# Altium PCB Antenna_sw.PcbDoc
Units mil, origin at the board's own origin, x right, y up, seen from the top; angles counter-clockwise.
Board outline 1574.8 x 1574.8 mil, 4 copper layers (Component Side, Ground Plane, Power Plane, Solder Side), stack 59.729 mil thick; 19 components, 15 nets, 89 pads, 209 vias.
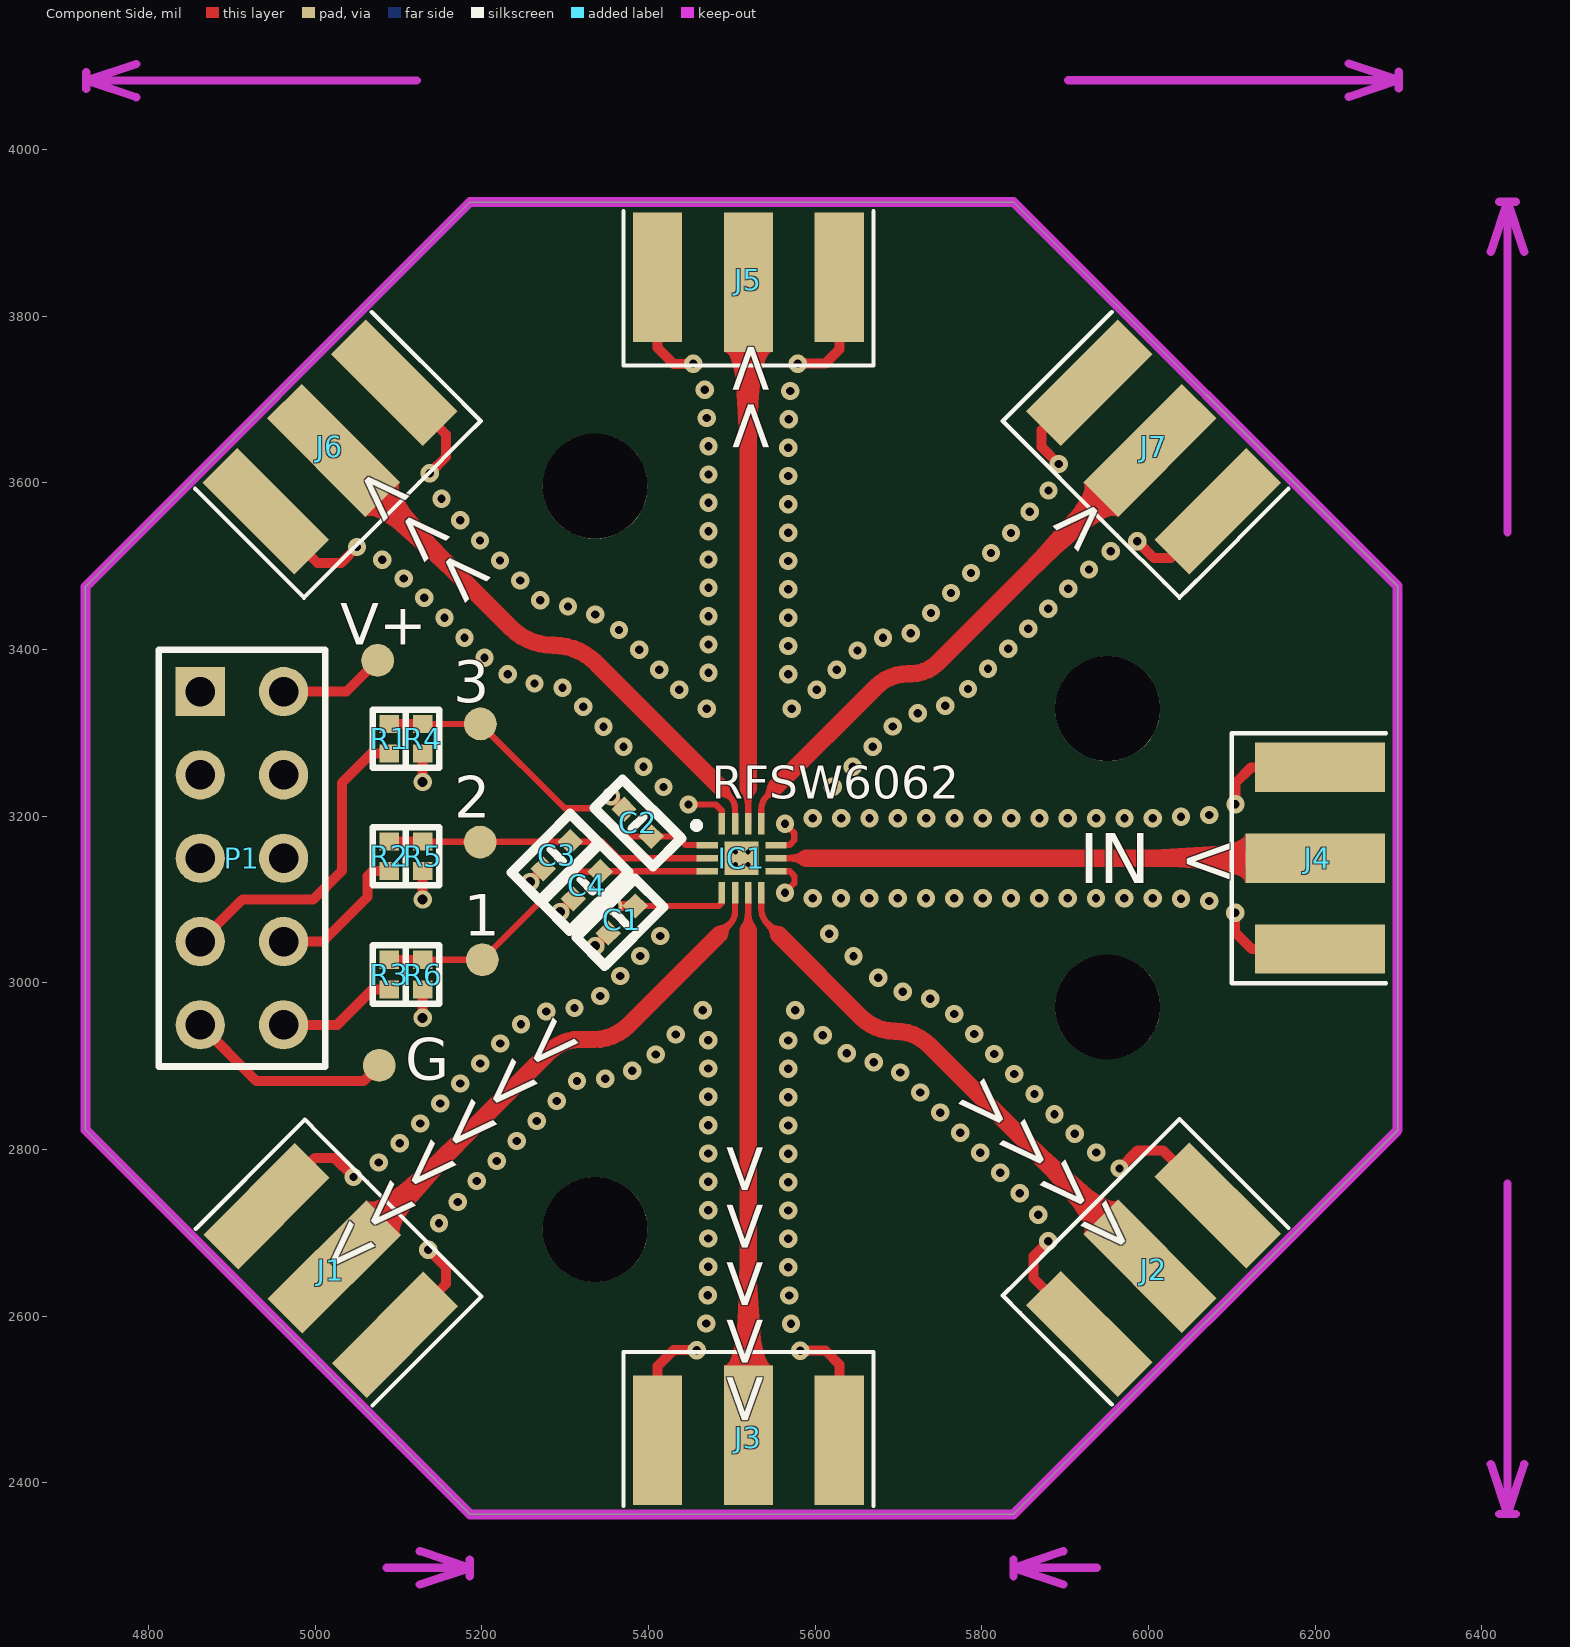
[diagram p0: Component Side view]
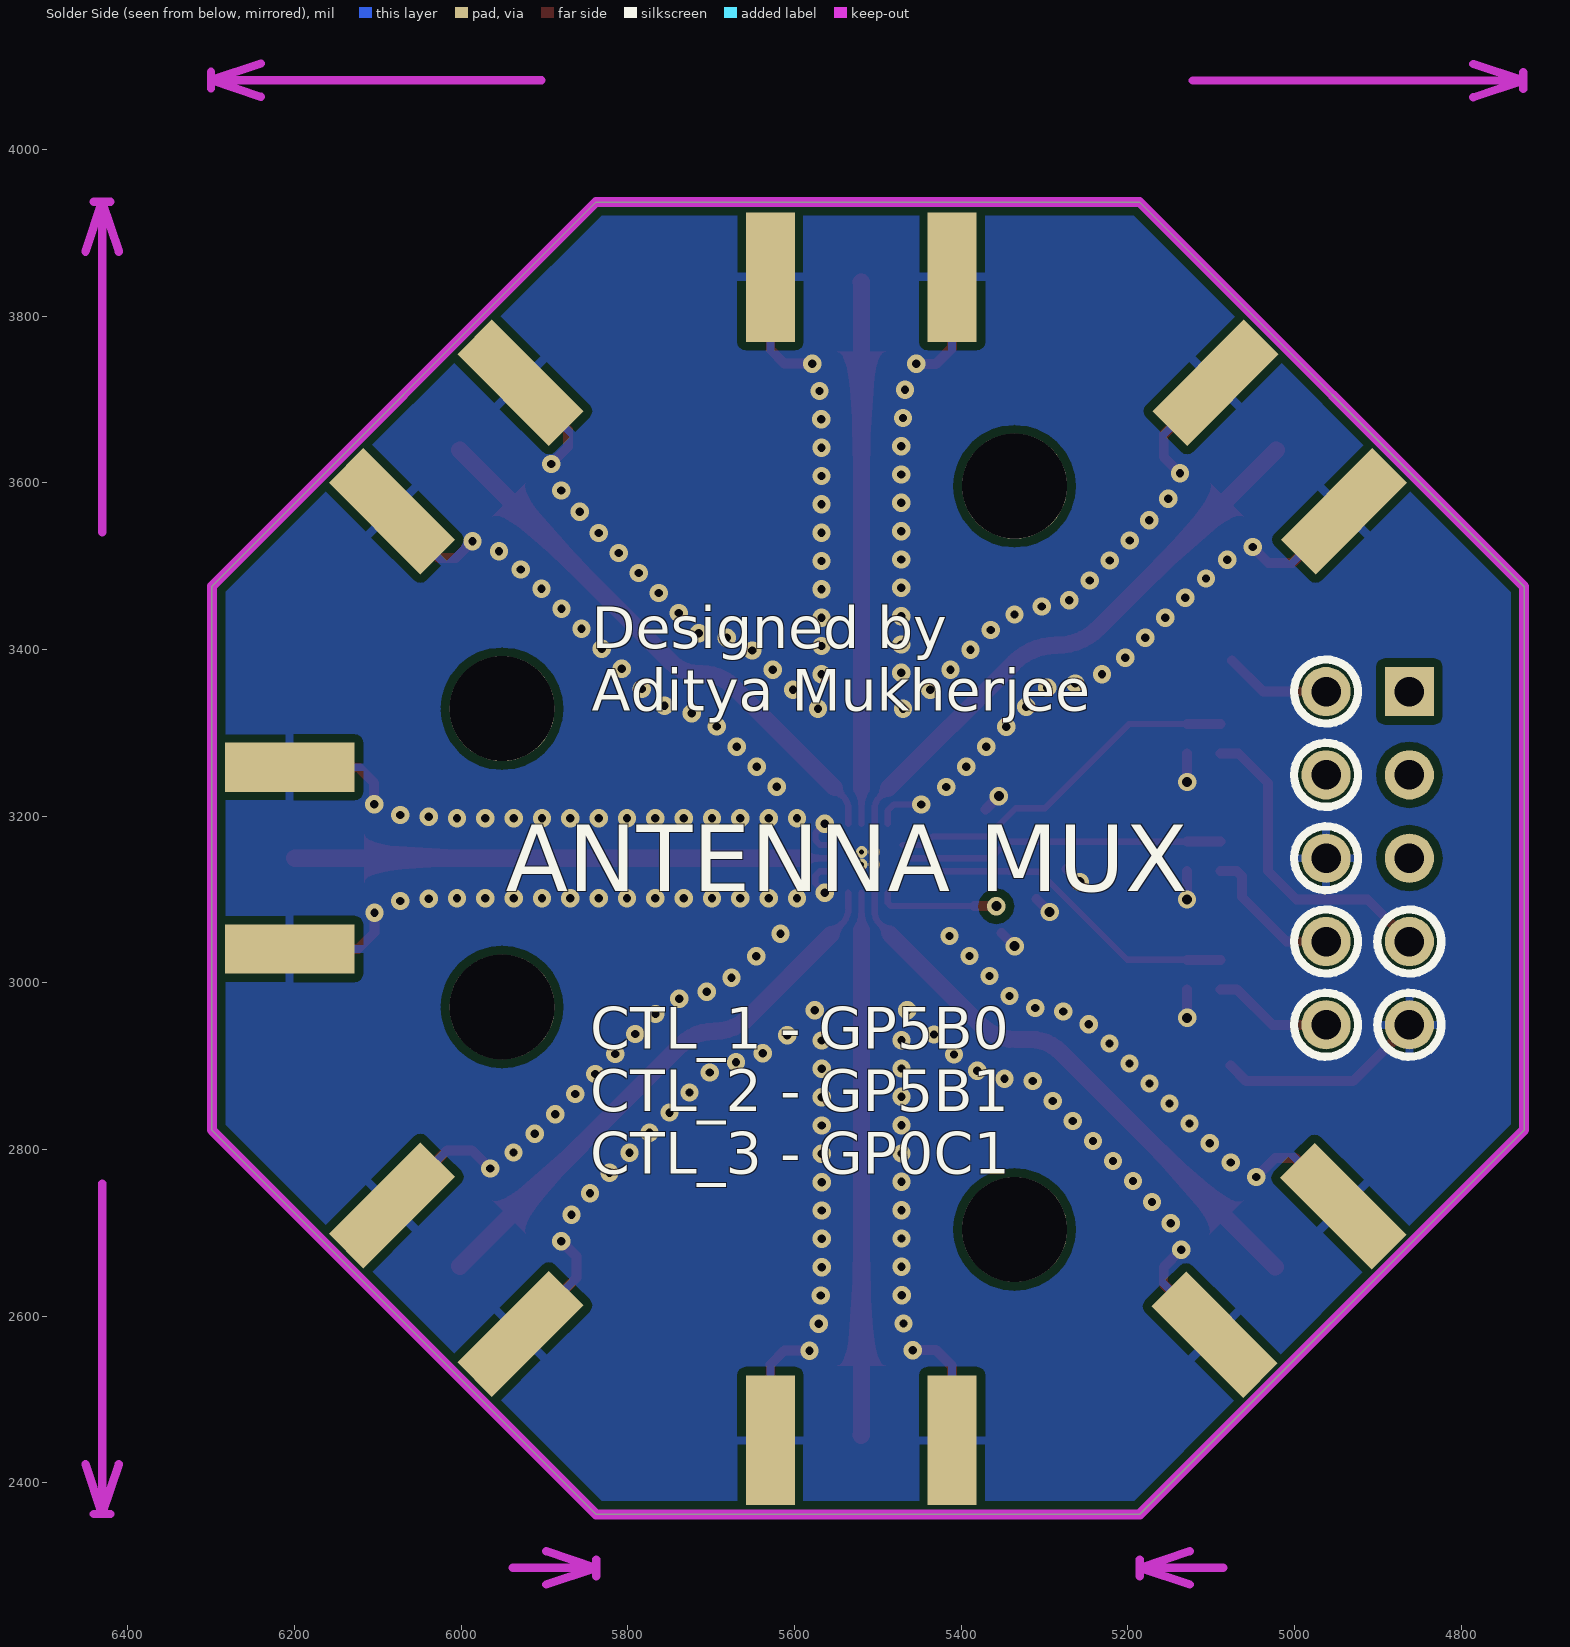
[diagram p1: Solder Side view, seen from below]
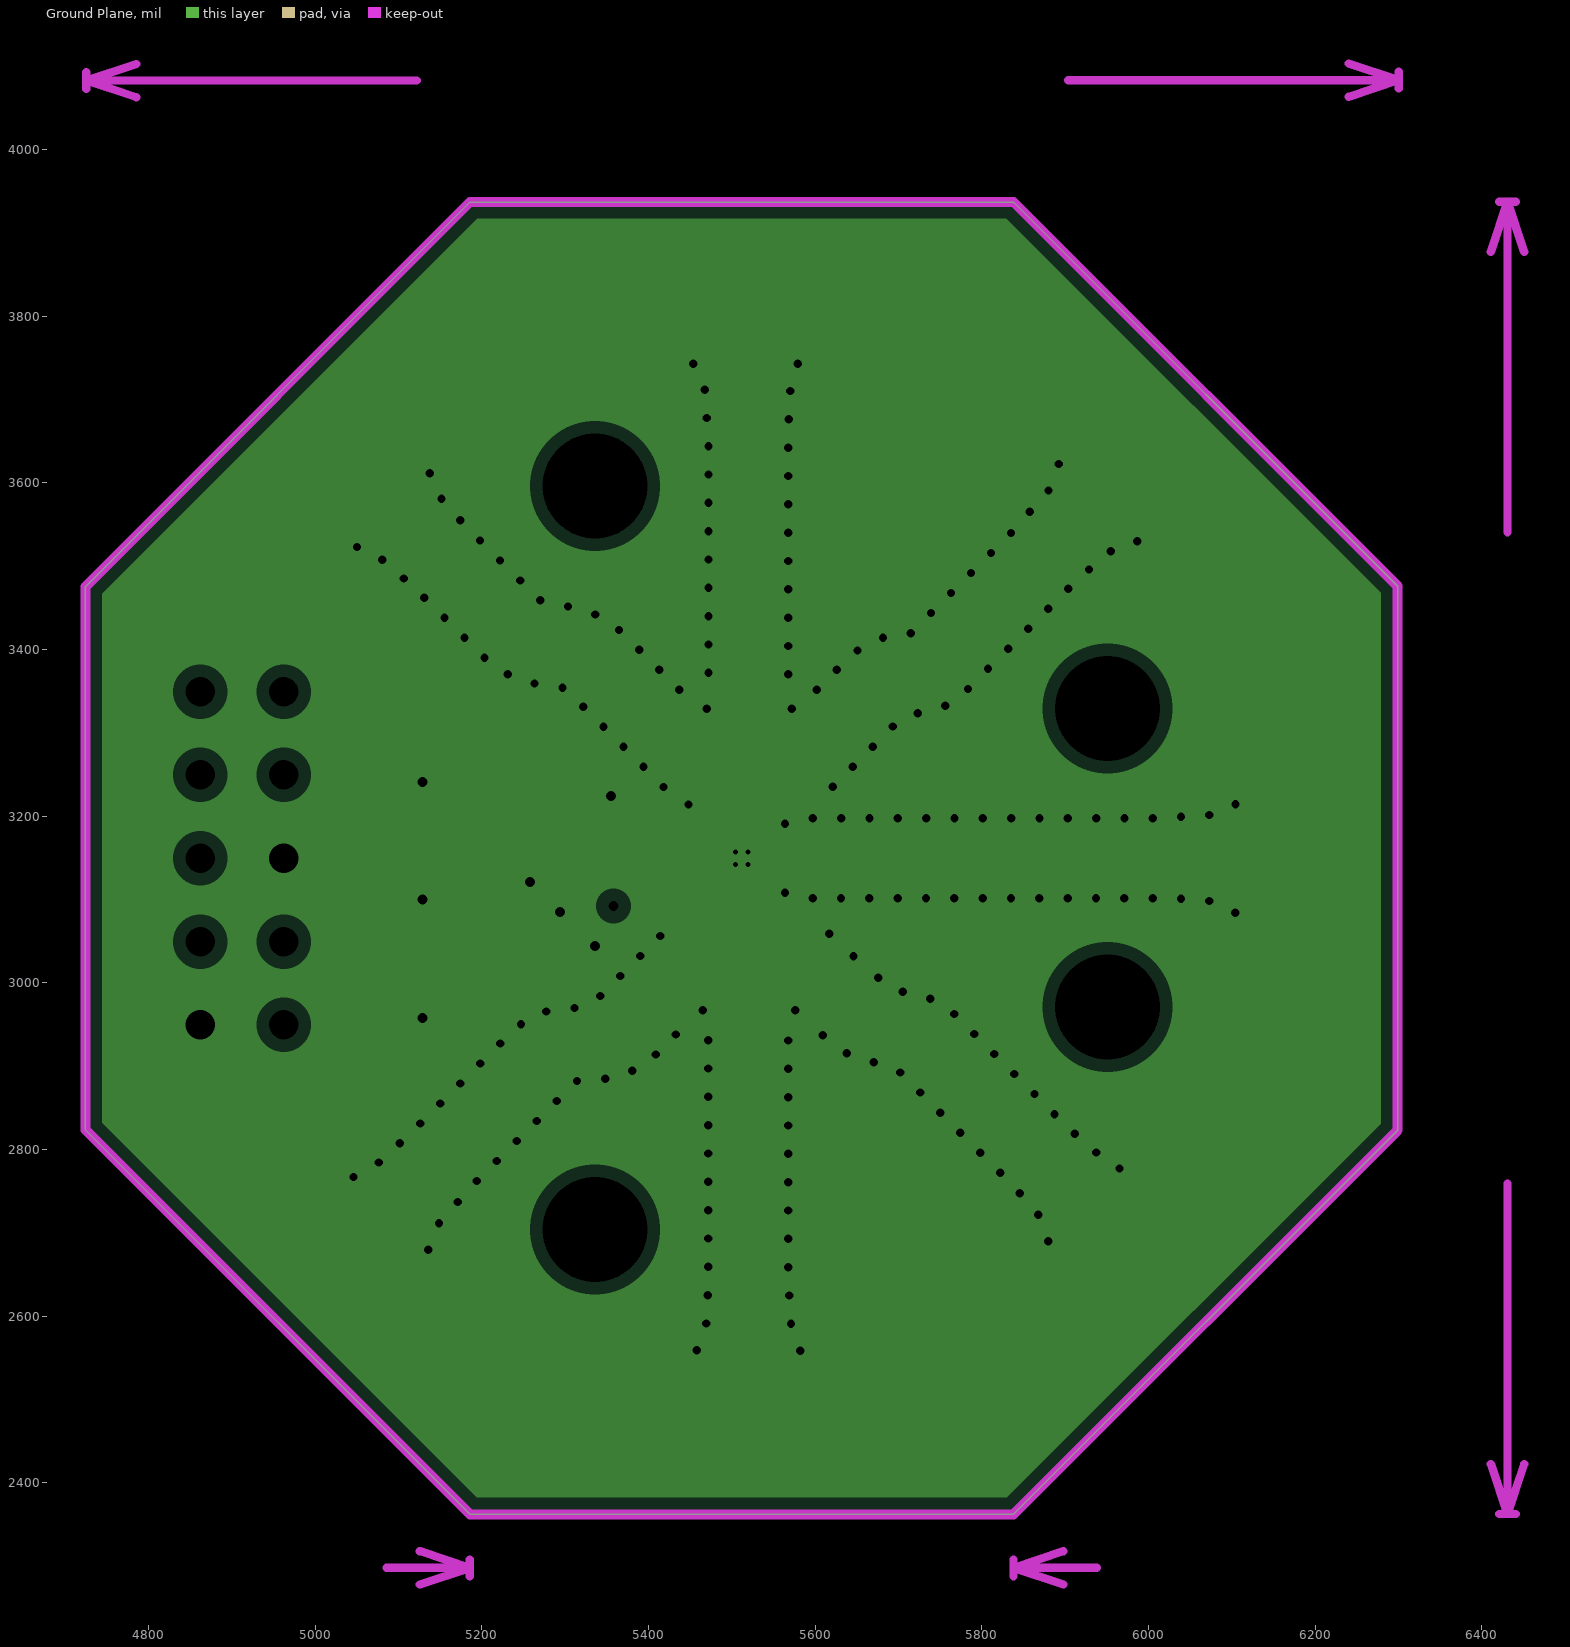
[diagram p2: Ground Plane, clearances drawn from the general rule]
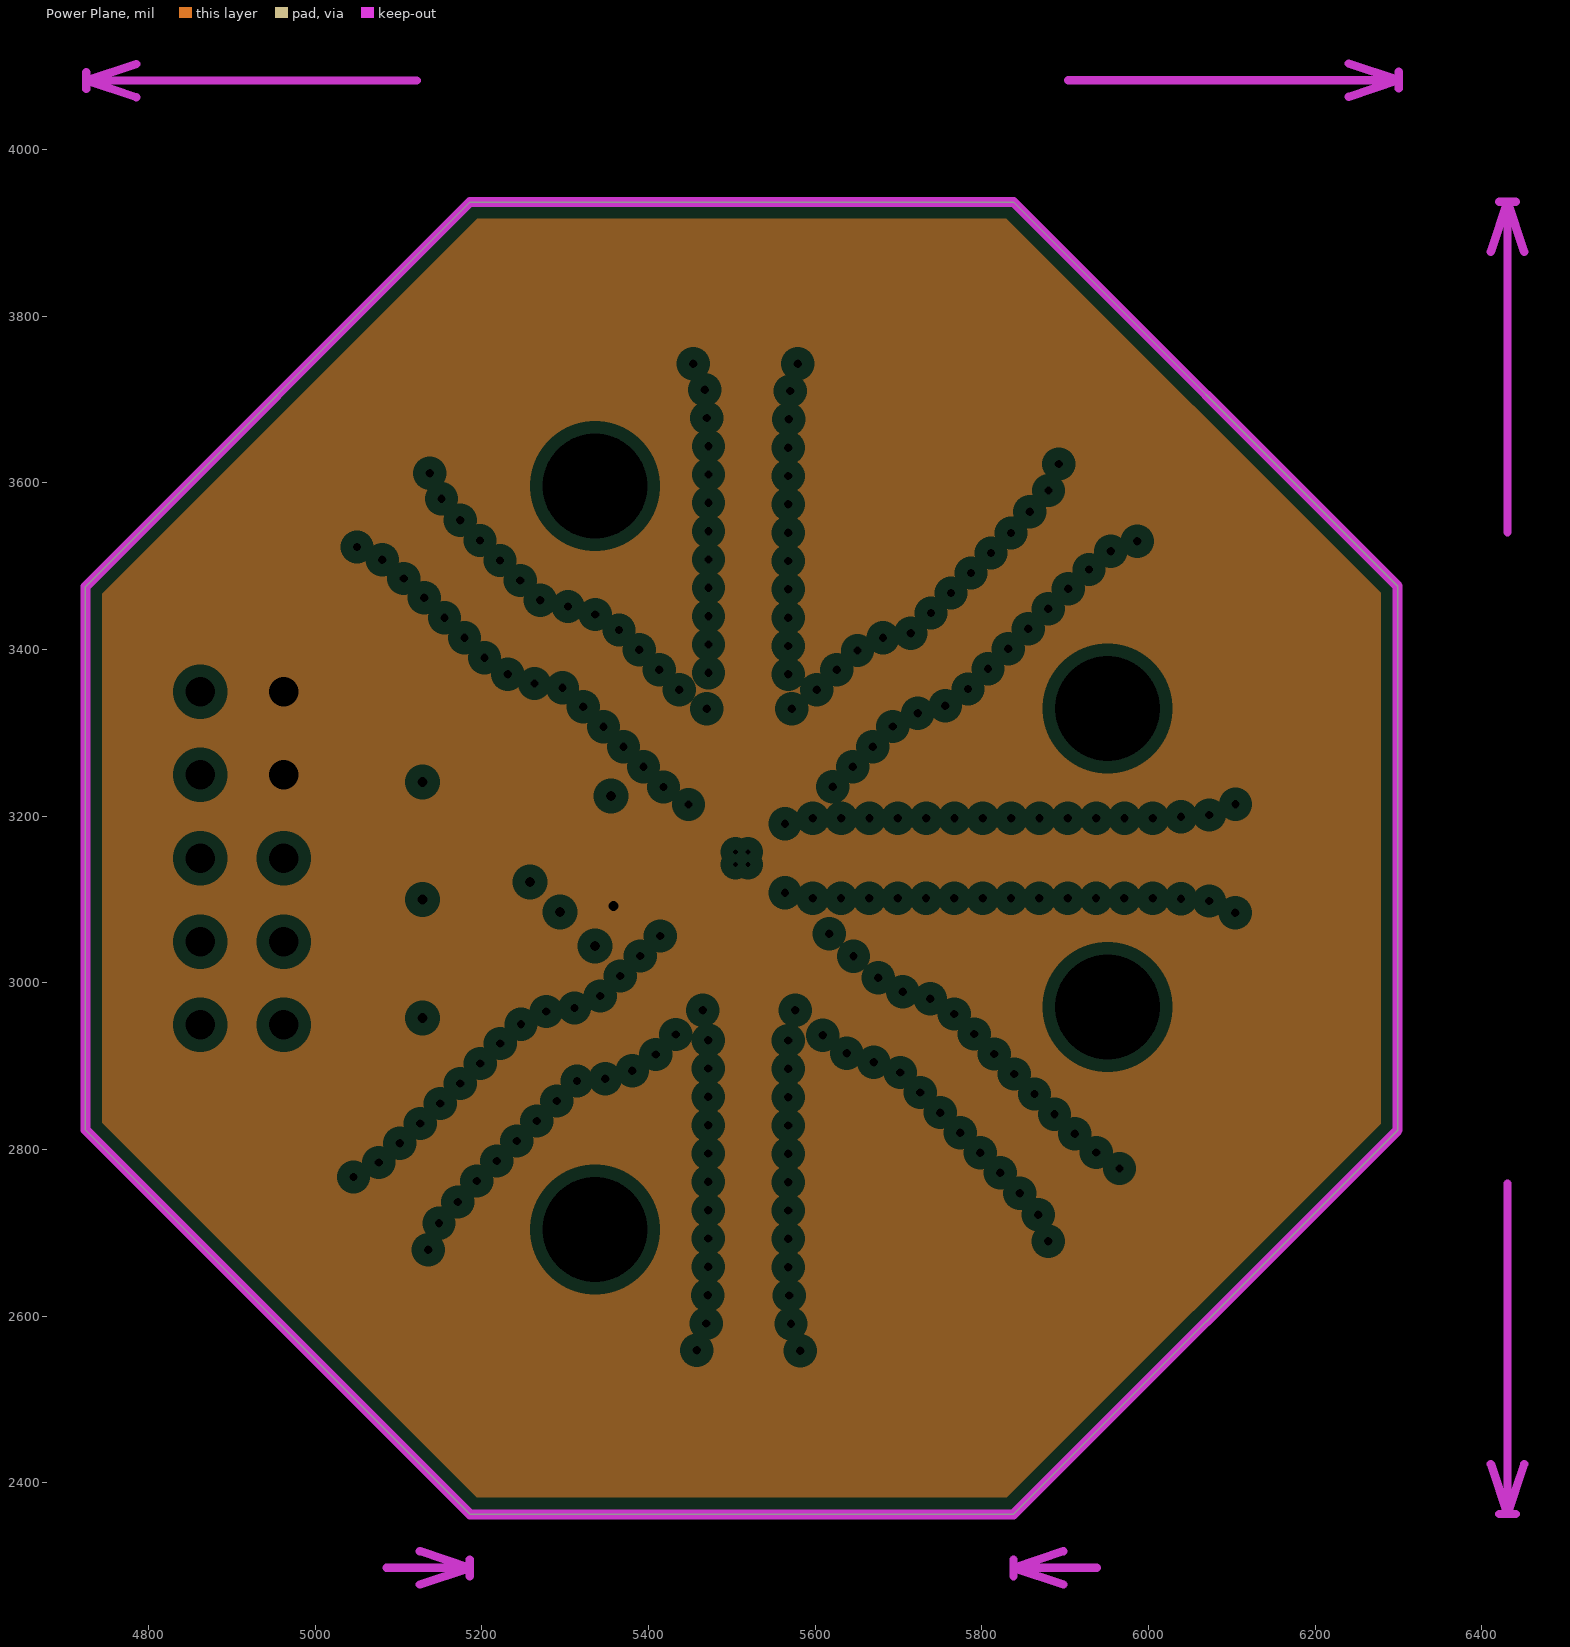
[diagram p3: Power Plane, clearances drawn from the general rule]

## Layer stack, top to bottom
Top Solder: solder mask 0.4, Solder Resist, Dk 3.5
Component Side: signal copper 1.4
Dielectric 1: prepreg 13.7795, FR-4, Dk 4.2
Ground Plane: plane copper 0.7087, net GND
Dielectric 3: core 27.9528, Dk 4.2
Power Plane: plane copper 0.7087, net VCC
Dielectric 4: prepreg 13.7795, Dk 4.2
Solder Side: signal copper 1.4
Bottom Solder: solder mask 0.4, Solder Resist, Dk 3.5

## Board outline
4724.41,2823.59 5185.8,2362.2 5838.2,2362.2 6299.21,2823.21 6299.21,3475.98 5838.18,3937.01 5186.01,3937.01 4724.41,3475.41

## Design rules (kind name [scope] priority, off if disabled: settings)
Clearance Clearance_4 [InNamedPolygon('gnd_bottom')] p1: gap=10 ignorepadtopadclearanceinfootprint=FALSE except(0: Arc-Hole Track-Hole SMDPad-Hole THPad-Hole Via-Hole Fill-Hole Poly-Hole Region-Hole Text-Hole)
Clearance Clearance_3 [InNamedPolygon('gnd_bottom')] p2: gap=7 ignorepadtopadclearanceinfootprint=FALSE
Clearance Clearance_2 [InNamedPolygon('gnd_bottom')] p3: gap=10 ignorepadtopadclearanceinfootprint=FALSE except(0: Arc-Hole Track-Hole SMDPad-Hole THPad-Hole Via-Hole Fill-Hole Poly-Hole Region-Hole Text-Hole)
Clearance Clearance_1 [InNamedPolygon('gnd_bottom')] p4: gap=15 ignorepadtopadclearanceinfootprint=FALSE
Clearance [All] p5: gap=5 ignorepadtopadclearanceinfootprint=FALSE
ComponentClearance [All] p1: gap=0 collisioncheckmode=3 verticalgap=0 showdistances=FALSE
PlaneClearance [All] p1: clearance=15
PlaneConnect [All] p1: planeconnectstyle=Direct reliefexpansion=20 reliefentries=4 reliefconductorwidth=10 reliefairgap=10
PolygonConnect PolygonConnect_5 [All vs IsNamedPolygon('gnd_bottom')] p1: thpad.connectstyle=Relief thpad.reliefconductorwidth=10 thpad.reliefentries=4 thpad.polygonreliefangle="90 Angle" thpad.airgapwidth=10 smdpad.connectstyle=Relief smdpad.reliefconductorwidth=10 smdpad.reliefentries=4 smdpad.polygonreliefangle="90 Angle" smdpad.airgapwidth=10 via.connectstyle=Direct via.reliefconductorwidth=10 via.reliefentries=4 via.polygonreliefangle="90 Angle" via.airgapwidth=10
PolygonConnect PolygonConnect_4 [All vs IsNamedPolygon('gnd_bottom')] p2: thpad.connectstyle=Relief thpad.reliefconductorwidth=10 thpad.reliefentries=4 thpad.polygonreliefangle="90 Angle" thpad.airgapwidth=10 smdpad.connectstyle=Relief smdpad.reliefconductorwidth=10 smdpad.reliefentries=4 smdpad.polygonreliefangle="90 Angle" smdpad.airgapwidth=10 via.connectstyle=Direct via.reliefconductorwidth=10 via.reliefentries=4 via.polygonreliefangle="90 Angle" via.airgapwidth=10
PolygonConnect PolygonConnect_3 [All vs IsNamedPolygon('gnd_bottom')] p3: connectstyle=Relief reliefconductorwidth=10 reliefentries=4 polygonreliefangle="90 Angle" airgapwidth=10
PolygonConnect PolygonConnect_2 [All vs IsNamedPolygon('gnd_bottom')] p4: thpad.connectstyle=Relief thpad.reliefconductorwidth=10 thpad.reliefentries=4 thpad.polygonreliefangle="90 Angle" thpad.airgapwidth=10 smdpad.connectstyle=Relief smdpad.reliefconductorwidth=10 smdpad.reliefentries=4 smdpad.polygonreliefangle="90 Angle" smdpad.airgapwidth=10 via.connectstyle=Direct via.reliefconductorwidth=10 via.reliefentries=4 via.polygonreliefangle="90 Angle" via.airgapwidth=10
PolygonConnect PolygonConnect_1 [All vs IsNamedPolygon('gnd_bottom')] p5: thpad.connectstyle=Relief thpad.reliefconductorwidth=10 thpad.reliefentries=4 thpad.polygonreliefangle="90 Angle" thpad.airgapwidth=10 smdpad.connectstyle=Direct smdpad.reliefconductorwidth=10 smdpad.reliefentries=4 smdpad.polygonreliefangle="90 Angle" smdpad.airgapwidth=10 via.connectstyle=Direct via.reliefconductorwidth=10 via.reliefentries=4 via.polygonreliefangle="90 Angle" via.airgapwidth=10
PolygonConnect [All] p6: connectstyle=Relief reliefconductorwidth=10 reliefentries=4 polygonreliefangle="90 Angle" airgapwidth=10
RoutingVias [All] p1: holewidth=10 width=25 viastyle="Through Hole" minholewidth=6 minwidth=10 maxholewidth=28 maxwidth=50
SolderMaskExpansion [All] p1: expansion=4
UnRoutedNet [All] p1: checkbadconnections=TRUE
Width [All] p1: maxlimit=30 minlimit=7 preferedwidth=12
26 further rules are at their usual default settings.

## Components (designator, comment, footprint, x,y, rotation, side; value= is the part's Value field where it differs from the comment)
C1 "10nF" SMD-0402C 5368,3076 r315 top
C2 "100pF" SMD-0402C 5387,3192 r225 top
C3 "100pF" SMD-0402C 5290,3153 r315 top
C4 "100pF" SMD-0402C 5326,3117 r315 top
IC1 "RFSW6062TR7" QFN40P200X200X60-15N-D 5511.81,3149.61 r0 top
J1 "Component_1" PCBComponent_1#1 5023,2659 r45 top
J2 "SMA" PCBComponent_1#1 6002,2660 r135 top
J3 "Component_1" PCBComponent_1#1 5520,2457 r90 top
J4 "RF_in" PCBComponent_1#1 6200,3149.61 r180 top
J5 "Component_1" PCBComponent_1#1 5520,3841 r270 top
J6 "Component_1" PCBComponent_1#1 5022,3639 r315 top
J7 "Component_1" PCBComponent_1#1 6002,3639 r225 top
P1 "Header 5X2" HDR2X5 4862.2,3349.61 r270 top
R1 "10K" PCBComponent_1#2 5089,3293 r270 top
R2 "10K" PCBComponent_1#2 5089,3152 r270 top
R3 "10K" PCBComponent_1#2 5089,3010 r270 top
R4 "33K" PCBComponent_1#2 5129,3293 r90 top
R5 "33K" PCBComponent_1#2 5129,3152 r90 top
R6 "33K" PCBComponent_1#2 5129,3010 r90 top

## Footprints (in the part's own frame and the unit in brackets; to place one, negate y for a bottom-side part, rotate by r counter-clockwise, add the part's x,y. Pads: shape width x height; smd on the part's side, far side on the other; paste and mask are expansions set on the pad)
HDR2X5 [mm] "Connector; Header; 5x2 Position"
  rect 1.5x1.5 hole 0.9: 1(0,0)
  round 1.5 hole 0.9: 2(0,2.54) 3(2.54,0) 4(2.54,2.54) 5(5.08,0) 6(5.08,2.54) 7(7.62,0) 8(7.62,2.54) 9(10.16,0) 10(10.16,2.54)
  silkscreen extent -1.27,-1.27 11.43,3.81
PCBComponent_1#1 [mm]
  rect 4.25x1.5 smd mask+0.05: 1(0,0)
  rect 3.95x1.5 smd mask+0.05: 2(-0.15,-2.77) 2(-0.15,2.77)
  rect 3.95x1.5 smd far side mask+0.05: 2(-0.15,-2.77) 2(-0.15,2.77)
  silkscreen extent -2.16,-3.81 2.54,3.81
PCBComponent_1#2 [mm]
  rect 0.55x0.6 smd: 1(-0.45,0) 2(0.45,0)
  silkscreen extent -0.89,-0.51 0.89,0.51, body extent -0.55,-0.25 0.55,0.25, height 0.35
QFN40P200X200X60-15N-D [mm]
  rect 0.65x0.2 smd: 1(-1.05,0.4) 2(-1.05,0) 3(-1.05,-0.4) 8(1.05,-0.4) 9(1.05,0) 10(1.05,0.4)
  rect 0.2x0.65 smd: 4(-0.6,-1.05) 5(-0.2,-1.05) 6(0.2,-1.05) 7(0.6,-1.05) 11(0.6,1.05) 12(0.2,1.05) 13(-0.2,1.05) 14(-0.6,1.05)
  rect 1.03x1.03 smd: 15(0,0)
  silkscreen extent -1.47,0.9 -1.28,1.1, body extent -1.05,-1.05 1.05,1.05, height 0.6
SMD-0402C [mm]
  rect 0.55x0.55 smd: 1(0,0.584) 2(0,-0.584)
  silkscreen extent -0.25,0 0.25,0, body extent -0.25,-0.51 0.25,0.51, height 0.51

## Part data
C1 C2 C3 C4: library part GCM155C71A105KE38D, "CAP CER 1UF 10V X7S 0402", Digi-Key Part Number=490-13409-1-ND, Manufacturer="Murata Electronics North America", Operating Temperature="-55°C ~ 125°C", Package / Case="0402 (1005 Metric)", Ratings=AEC-Q200, Temperature Coefficient=X7S, Tolerance=±10%, Voltage=10V, @ qty=0, Applications=Automotive, Datasheets=http://www.murata.com/~/media/webrenewal/support/library/catalog/products/capacitor/mlcc/c03e.ashx, Factory Stock=0, Features=-, Height - Seated (Max)=-, Image=//media.digikey.com/Renders/Murata%20Renders/ZRB-SERIES-0402.jpg, Lead Spacing=-, Lead Style=-, Minimum Quantity=1, Mounting Type="Surface Mount, MLCC", Packaging="Cut Tape (CT)", Part Number=GCM155C71A105KE38D, Part Status=Active, Quantity Available=7240, Series=GCM, Size / Dimension="0.039\" L x 0.020\" W (1.00mm x 0.50mm)", Thickness (Max)="0.022\" (0.55mm)", Unit Price (USD)=0.12
IC1: "Integrated Circuit", Manufacturer_Name=RFMD, Mouser Part Number=772-RFSW6062, Datasheet Link=https://componentsearchengine.com/Datasheets/1/RFSW6062TR7.pdf, Height=0.6mm, Manufacturer_Part_Number=RFSW6062TR7
J2 J4 R1 R2 R3 R4 R5 R6: library part Component_1
P1: "Header, 5-Pin, Dual row", LatestRevisionDate=17-Jul-2002, LatestRevisionNote="Re-released for DXP Platform.", Publisher="Altium Limited"

## Free pads (board coordinates)
  round 39.37 smd: 2(5075,3387) 3(5077,2901) 4(5198.29,3310.71) 5(5198,3169) 6(5200.72,3027.72)
  round 125.98 hole 125.98 unplated: Hole_1(5951,3329) Hole_2(5951,2971) Hole_3(5336,2704) Hole_4(5336,3596)

## Via types
v1: diameter 22, hole 10, Component Side to Solder Side, tented both sides, 197 vias
v2: diameter 22, hole 12, Component Side to Solder Side, tented both sides, 8 vias
v3: diameter 14, hole 6, Component Side to Solder Side, tented bottom, 4 vias

## Nets (pads, with @x,y where several pads share a name; then routed paths per layer and width w, separated by ;. In a path a pad name is that pad's centre, name@x,y a point inside that pad or via, vN(x,y) a via of type N, cw(c..) or ccw(c..) an arc to the next point about the centre after c; other vN are vias at no path point)
CTL_1: C4.1 IC1.3 pad.6 R3.1 R6.2 | length 425.4
  Component Side w7.6: R6.2 pad.6 5306.26,3133.26 C4.1 5342.86,3133.86 IC1.3
  Component Side w12: R3.1 R6.2
CTL_1H: P1.10 R3.2 | length 144.5
  Component Side w12: P1.10 5026.61,2949.61 5069.28,2992.28 R3.2
CTL_2: C3.1 IC1.2 pad.5 R2.1 R5.2 | length 389.8
  Component Side w7.6: R5.2 5129.44,3169.26 C3.1 5344.74,3169.26 5364.39,3149.61 IC1.2
  Component Side w12: R2.1 R5.2
CTL_2H: P1.8 R2.2 | length 176.5
  Component Side w12: P1.8 5009.61,3049.61 5063,3103 5063,3128 5069.28,3134.28 R2.2
CTL_3: C2.1 IC1.1 pad.4 R1.1 R4.2 | length 441.7
  Component Side w7.6: R4.2 pad.4 5299.52,3209.48 5334.52,3209.48 5368.26,3175.74 C2.1 5434.26,3175.74 5444.65,3165.35 IC1.1
  Component Side w12: R1.1 R4.2
CTL_3H: P1.7 R1.2 | length 382.2
  Component Side w12: P1.7 4912.6,3100 4997.72,3100 5032,3134.28 5032,3240 5067.28,3275.28 R1.2
GND: C1.2 C2.2 C3.2 C4.2 IC1.8 IC1.10 IC1.14 IC1.15 J1.2 J2.2 J3.2 J4.2 J5.2 J6.2 J7.2 P1.6 P1.9 pad.3 R4.1 R5.1 R6.1 | length 2554.7
  Component Side w7.6: v1(5448,3214) 5481,3214 5488.19,3206.81 IC1.14 ; IC1.8 5569.54,3133.86 5575.2,3128.2 5575.2,3119.6 v1(5563.8,3108.2) ; IC1.10 5569.25,3165.35 5575,3171.1 5575,3179.88 v1(5563.84,3191.04)
  Component Side w12: P1.9 4929.81,2882 5058,2882 pad.3 ; J6.2@4940.71,3566.06 5002.77,3504 5031.33,3504 v1(5050.35,3523.03) ; J1.2@4941.71,2731.94 4999.77,2790 5023,2790 v1(5046,2767) ; J6.2@5094.94,3720.29 5157,3658.23 5157,3631.14 v1(5137.54,3611.69) ; J1.2@5095.94,2577.71 5157,2638.77 5157,2658.77 v1(5135.88,2679.89) ; v2(5129,2958) R6.1 ; v2(5129,3100) R5.1 ; v2(5129,3241) R4.1 ; v2(5258,3121) C3.2 ; v2(5294,3085) C4.2 ; v2(5336,3044) C1.2 ; v2(5355,3224) C2.2 ; J3.2@5410.94,2451.09 5410.94,2539.94 5430.14,2559.14 v1(5458.08,2559.14) ; J5.2@5410.94,3846.91 5410.94,3762.06 5430.03,3742.97 v1(5453.85,3742.97) ; v1(5579,3743) 5612,3743 5629.06,3760.06 J5.2@5629.06,3846.91 ; v1(5582.11,2558.68) 5612.32,2558.68 5629.06,2541.94 J3.2@5629.06,2451.09 ; v1(5880,2690) 5862,2672 5862,2645.77 J2.2@5929.06,2578.71 ; v1(5892.21,3622.73) 5872,3642.94 5872,3663.23 J7.2@5929.06,3720.29 ; v1(5965.26,2777.15) 5987.11,2799 6017.23,2799 J2.2@6083.29,2732.94 ; v1(5986.59,3529.88) 6006.47,3510 6027.23,3510 J7.2@6083.29,3566.06 ; v1(6104.12,3084.32) 6104.12,3060.48 6124.05,3040.55 J4.2@6205.91,3040.55 ; v1(6104.54,3214.3) 6104.54,3239.84 6123.36,3258.66 J4.2@6205.91,3258.66
  other v1: 5469.27,2591.24 5571.05,2590.83 5471.29,2625.18 5568.8,2624.75 5471.76,2659.18 5567.61,2658.73 5471.76,2693.18 5567.61,2692.73 5148.67,2711.39 5867.73,2721.71 5471.76,2727.18 5567.61,2726.73 5171.1,2736.95 5845.6,2747.52 5471.76,2761.18 5567.61,2760.73 5193.92,2762.15 5822.16,2772.15 5076.52,2784.51 5217.96,2786.19 5471.76,2795.18 5567.61,2794.73 5798.16,2796.24 5937.29,2796.48 5101.73,2807.33 5242,2810.23 5911.74,2818.91 5774.12,2820.28 5471.76,2829.18 5567.61,2828.73 5126.02,2831.12 5266.05,2834.27 5887.26,2842.51 5750.08,2844.32 5150.06,2855.16 5290.09,2858.31 5471.76,2863.18 5567.61,2862.73 5863.22,2866.55 5726.04,2868.36 5174.1,2879.2 5314.2,2882.28 5348.09,2885.11 5839.18,2890.59 5702,2892.4 5380.71,2894.69 5471.76,2897.18 5567.61,2896.73 5198.14,2903.24 5670.34,2904.8 5408.67,2914.03 5815.14,2914.63 5638.09,2915.56 5222.18,2927.29 5471.76,2931.18 5567.61,2930.73 5609,2937 5432.78,2938.01 5791.1,2938.68 5247.04,2950.48 5766.9,2962.56 5277.53,2965.53 5465,2967 5576,2967 5311.26,2969.81 5738.33,2981 5342.07,2984.18 5705.36,2989.31 5675.75,3006.02 5366.11,3008.22 5390.16,3032.26 5646,3032 5414.2,3056.3 5617,3059 6073.07,3098.17 6039.17,3100.79 5597.18,3101.73 5631.18,3101.73 5665.18,3101.73 5699.18,3101.73 5733.18,3101.73 5767.18,3101.73 5801.18,3101.73 5835.18,3101.73 5869.18,3101.73 5903.18,3101.73 5937.18,3101.73 5971.18,3101.73 6005.18,3101.66 5597.21,3197.53 5631.21,3197.53 5665.21,3197.53 5699.21,3197.53 5733.21,3197.53 5767.21,3197.53 5801.21,3197.53 5835.21,3197.53 5869.21,3197.53 5903.21,3197.53 5937.21,3197.53 5971.21,3197.53 6005.21,3197.53 6039.17,3199.15 6073.1,3201.36 5418.11,3235.12 5621.23,3235.46 5394.06,3259.16 5645.27,3259.5 5370.02,3283.2 5669.31,3283.54 5345.98,3307.25 5693.36,3307.58 5723.37,3323.55 5470,3329 5572,3329 5321.94,3331.29 5756.15,3332.57 5437.05,3351.73 5602.01,3351.78 5783.52,3352.75 5296.84,3354.23 5263.23,3359.33 5567.79,3370.25 5231.12,3370.53 5472,3372 5413.01,3375.77 5626.05,3375.82 5807.56,3376.79 5203.24,3389.98 5650.97,3398.95 5388.96,3399.81 5831.6,3400.83 5567.79,3404.25 5472,3406 5179.2,3414.03 5681.41,3414.09 5714.94,3419.75 5364.58,3423.51 5855.65,3424.87 5155.16,3438.07 5567.79,3438.25 5472,3440 5336.08,3442.04 5739,3443.77 5879.69,3448.91 5303.44,3451.58 5270.27,3459.02 5131.12,3462.11 5763.04,3467.81 5567.79,3472.25 5903.84,3472.84 5472,3474 5245.97,3482.8 5106.29,3485.34 5787.08,3491.86 5928.69,3496.05 5567.79,3506.25 5221.93,3506.85 5080.73,3507.76 5472,3508 5811.12,3515.9 5954.8,3517.83 5197.89,3530.89 5567.79,3540.25 5835.17,3539.94 5472,3542 5174.2,3555.28 5857.71,3565.39 5567.79,3574.25 5472,3576 5151.71,3580.78 5880.13,3590.95 5567.79,3608.25 5472,3610 5567.79,3642.25 5472,3644 5568.2,3676.25 5469.86,3677.93 5570.05,3710.2 5467.56,3711.85
  other v3: 5504.5,3142 5519.5,3142 5504.5,3157 5519.5,3157
NetIC1_5: IC1.5 J1.1 | length 679.8
  Component Side w7.6: 5485,3058 5498,3071 ccw(c5483.67,3085.33) 5503.94,3085.33 IC1.5
  Component Side w20.8: J1.1 5281.15,2917.15 cw(c5317,2881.3) 5317,2932 5334.41,2932 ccw(c5334.41,2991.36) 5376.38,2949.38 5485,3058
NetIC1_6: IC1.6 J3.1 | length 651.4
  Component Side w7.6: 5519.69,3063.32 IC1.6
  Component Side w20.8: 5519.69,3063.32 5519.69,2457.32 J3.1
NetIC1_7: IC1.7 J2.1 | length 663.5
  Component Side w7.6: IC1.7 5535.43,3089.27 ccw(c5561.27,3089.27) 5543,3071 5556.43,3057.57
  Component Side w20.8: 5556.43,3057.57 5655.03,2958.97 ccw(c5696,2999.94) 5696,2942 cw(c5696,2884.06) 5736.97,2925.03 J2.1
NetIC1_9: IC1.9 J4.1 | length 646.9
  Component Side w7.6: IC1.9 5589.29,3149.61
  Component Side w20.8: 5589.29,3149.61 J4.1
NetIC1_11: IC1.11 J7.1 | length 662.4
  Component Side w7.6: IC1.11 5535.43,3208.15 cw(c5557.85,3208.15) 5542,3224 5553,3235
  Component Side w20.8: 5553,3235 5672.74,3354.74 cw(c5712,3315.47) 5712,3371 5715.21,3371 ccw(c5715.21,3416.36) 5747.28,3384.28 J7.1
NetIC1_12: IC1.12 J5.1 | length 650.2
  Component Side w7.6: IC1.12 5519.69,3233.68
  Component Side w20.8: 5519.69,3233.68 5519.69,3840.68 J5.1
NetIC1_13: IC1.13 J6.1 | length 675.7
  Component Side w7.6: 5487,3234 5498,3223 cw(c5483.67,3208.67) 5503.94,3208.67 IC1.13
  Component Side w20.8: J6.1 5234.79,3426.21 ccw(c5286,3477.43) 5286,3405 cw(c5286,3332.57) 5337.21,3383.79 5487,3234
VCC: C1.1 IC1.4 P1.2 P1.4 pad.2 | length 272.3
  Component Side w7.6: C1.1 5484.26,3092.26 5488.19,3096.19 IC1.4
  Component Side w12: P1.2 5037.61,3349.61 pad.2 ; v2(5358,3092) 5384,3092 C1.1
pads on no net: P1.1 P1.3 P1.5

## Polygon pours and split planes (outlines as drawn)
GND on Solder Side "gnd_bottom" (solid, pour order 1): 4724.41,2823.59 5185.8,2362.2 5838.2,2362.2 6299.21,2823.21 6299.21,3475.98 5838.18,3937.01 5186.01,3937.01 4724.41,3475.41
GND on Ground Plane (split plane): 6279.12,3467.65 6279.12,2831.54 5829.88,2382.3 5194.12,2382.3 4744.51,2831.91 4744.51,3467.09 5194.33,3916.91 5829.86,3916.91
VCC on Power Plane (split plane): 6279.12,3467.65 6279.12,2831.54 5829.88,2382.3 5194.12,2382.3 4744.51,2831.91 4744.51,3467.09 5194.33,3916.91 5829.86,3916.91

## Keep-outs
Keep-Out Layer:
  lines w10: 4725.52,4092.78 4725.53,4072.78 ; 4785.52,4102.8 4725.53,4082.78 ; 4785.53,4062.8 4725.53,4082.78 ; 5085.7,2297.96 5185.7,2297.96 ; 5122.05,4082.92 4725.53,4082.78 ; 5125.7,2277.96 5185.7,2297.96 ; 5125.7,2317.96 5185.7,2297.96 ; 5185.7,2287.96 5185.7,2307.96 ; 5838.11,2287.96 5838.11,2307.96 ; 5898.11,2277.96 5838.11,2297.96 ; 5898.11,2317.96 5838.11,2297.96 ; 5903.81,4083.2 6300.33,4083.34 ; 5938.11,2297.96 5838.11,2297.96 ; 6240.32,4103.32 6300.33,4083.34 ; 6240.34,4063.32 6300.33,4083.34 ; 6300.33,4073.34 6300.33,4093.34 ; 6411,2422.66 6431.01,2362.66 ; 6410.98,3877.46 6430.98,3937.46 ; 6421.01,2362.66 6441.01,2362.66 ; 6420.98,3937.46 6440.98,3937.46 ; 6431,2759.18 6431.01,2362.66 ; 6430.99,3540.94 6430.98,3937.46 ; 6451,2422.66 6431.01,2362.66 ; 6450.98,3877.46 6430.98,3937.46
  lines w12: 4724.41,2823.59 4724.41,3475.41 5186.01,3937.01 5838.18,3937.01 6299.21,3475.98 6299.21,2823.21 5838.2,2362.2 5185.8,2362.2 4724.41,2823.59
  text "1574.803 (mil)" at 5132.06,4046.93 h60 r0.02
  text "1574.803 (mil)" at 6395,3530.94 h60 r270
  text "652.409 (mil)" at 5156.02,2154 h60

## Silkscreen, mask and mechanical layers (free items; w line width, h text height)
Top Overlay:
  lines w12: 5235.5,3132.5 5277,3174 5306,3203 5340,3169 5269.5,3098.5 5235.5,3132.5 ; 5271.5,3096.5 5305.5,3062.5 5376,3133 5342,3167 5313,3138 5271.5,3096.5 ; 5313.5,3054.5 5347.5,3020.5 5418,3091 5384,3125 5355,3096 5313.5,3054.5 ; 5335,3210 5369,3244 5439.5,3173.5 5405.5,3139.5 5364,3181 5335,3210
  text ">>" at 5549,3634 h60 r90
  text ">" at 5913,3508 h60 r45
  text ">>>" at 5220.5,3483 h60 r135
  text "V+" at 5030,3405.5 h50
  text "3" at 5165.5,3337 h50
  text "RFSW6062" at 5476,3221 h40
  text "2" at 5167,3198 h50
  text "IN" at 5917,3119.5 h60
  text "<" at 6037.5,3119.5 h60
  text "1" at 5178.5,3056.5 h50
  text ">>>>>>" at 5289,2968 h60 r225
  text "G" at 5108,2884 h50
  text ">>>>" at 5762.5,2858 h60 r315
  text ">>>>>" at 5490,2811 h60 r270
Bottom Overlay:
  circle w10: c4862.2,3049.61 r38.39
  circle w10: c4862.2,2949.61 r38.39
  circle w10: c4962.2,2949.61 r38.39
  circle w10: c4962.2,3049.61 r38.39
  circle w10: c4962.2,3149.61 r38.39
  circle w10: c4962.2,3249.61 r38.39
  circle w10: c4962.2,3349.61 r38.39
  text "Designed by  / Aditya Mukherjee" at 5843.5,3326.5 h50
  text "ANTENNA MUX" at 5946.5,3110 h80
  text "CTL_1 - GP5B0 / CTL_2 - GP5B1 / CTL_3 - GP0C1" at 5845.5,2771 h50
Board Outline:
  lines w5: 4724.41,2823.59 4724.41,3475.41 5186.01,3937.01 5838.18,3937.01 6299.21,3475.98 6299.21,2823.21 5838.2,2362.2 5185.8,2362.2 4724.41,2823.59
  lines w10: 4725.47,4072.84 4725.46,4092.84 ; 4785.47,4062.87 4725.46,4082.84 ; 4785.46,4102.87 4725.46,4082.84 ; 5085.5,2298 5185.5,2298 ; 5121.99,4082.99 4725.46,4082.84 ; 5125.5,2278 5185.5,2298 ; 5125.5,2318 5185.5,2298 ; 5185.5,2288 5185.5,2308 ; 5837.91,2288 5837.91,2308 ; 5897.91,2278 5837.91,2298 ; 5897.91,2318 5837.91,2298 ; 5903.74,4083.27 6300.27,4083.41 ; 5937.91,2298 5837.91,2298 ; 6240.27,4063.39 6300.27,4083.41 ; 6240.26,4103.39 6300.27,4083.41 ; 6300.27,4073.41 6300.26,4093.41 ; 6411.02,2422.7 6431.02,2362.7 ; 6411,3877.5 6431,3937.5 ; 6421.02,2362.7 6441.02,2362.7 ; 6421,3937.5 6441,3937.5 ; 6431.02,2759.22 6431.02,2362.7 ; 6431.01,3540.98 6431,3937.5 ; 6451.02,2422.7 6431.02,2362.7 ; 6451,3877.5 6431,3937.5
  text "1574.803 (mil)" at 5132,4047 h60 r0.02
  text "1574.803 (mil)" at 6395.02,3530.98 h60 r270
  text "652.409 (mil)" at 5155.82,2154.04 h60

## Dimensions
5185.8,2362.2 to 4724.41,2823.59 on Board Outline
5185.8,2362.2 to 4724.41,2823.59 on Keep-Out Layer